# Allegro board pc065a_toplevel_06.brd
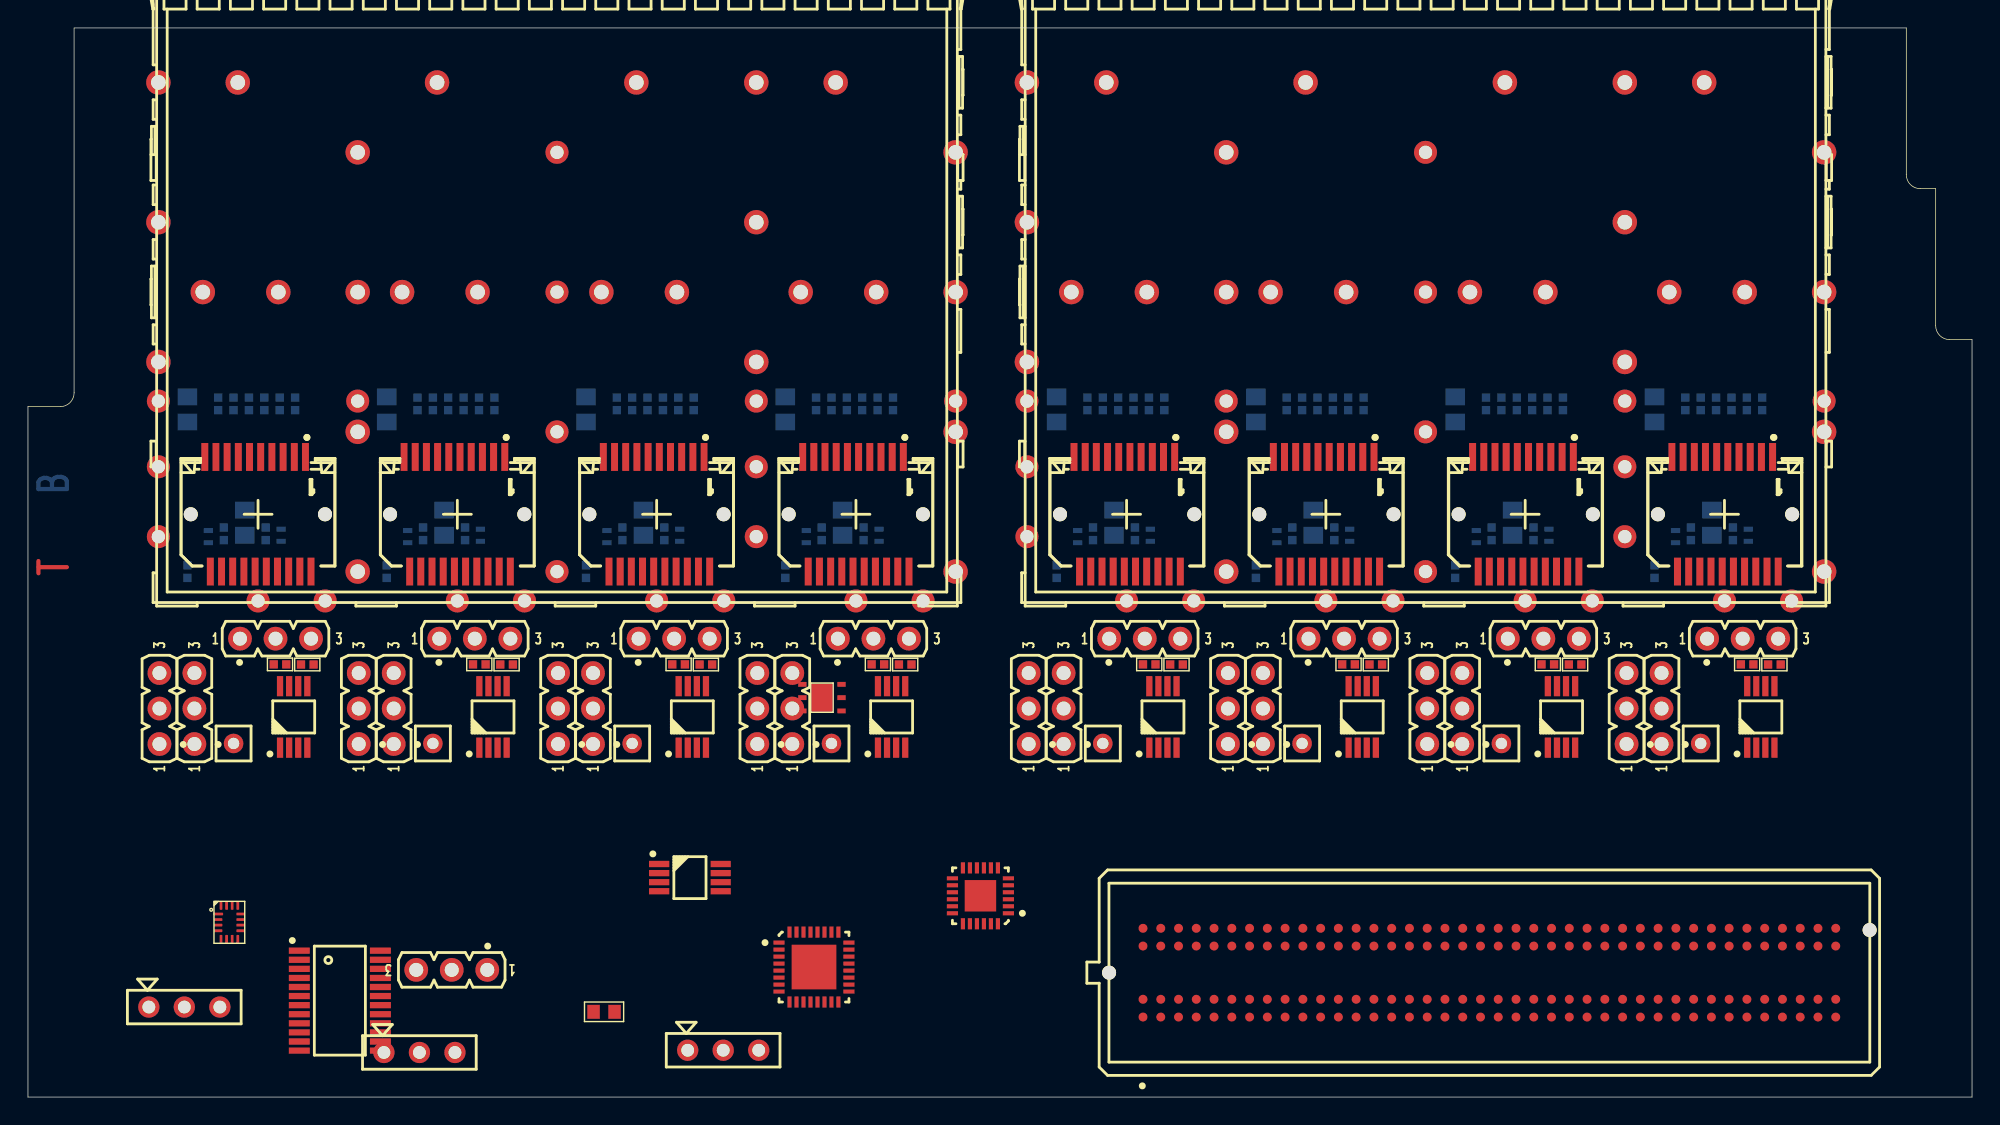
[diagram p0: board, top side]
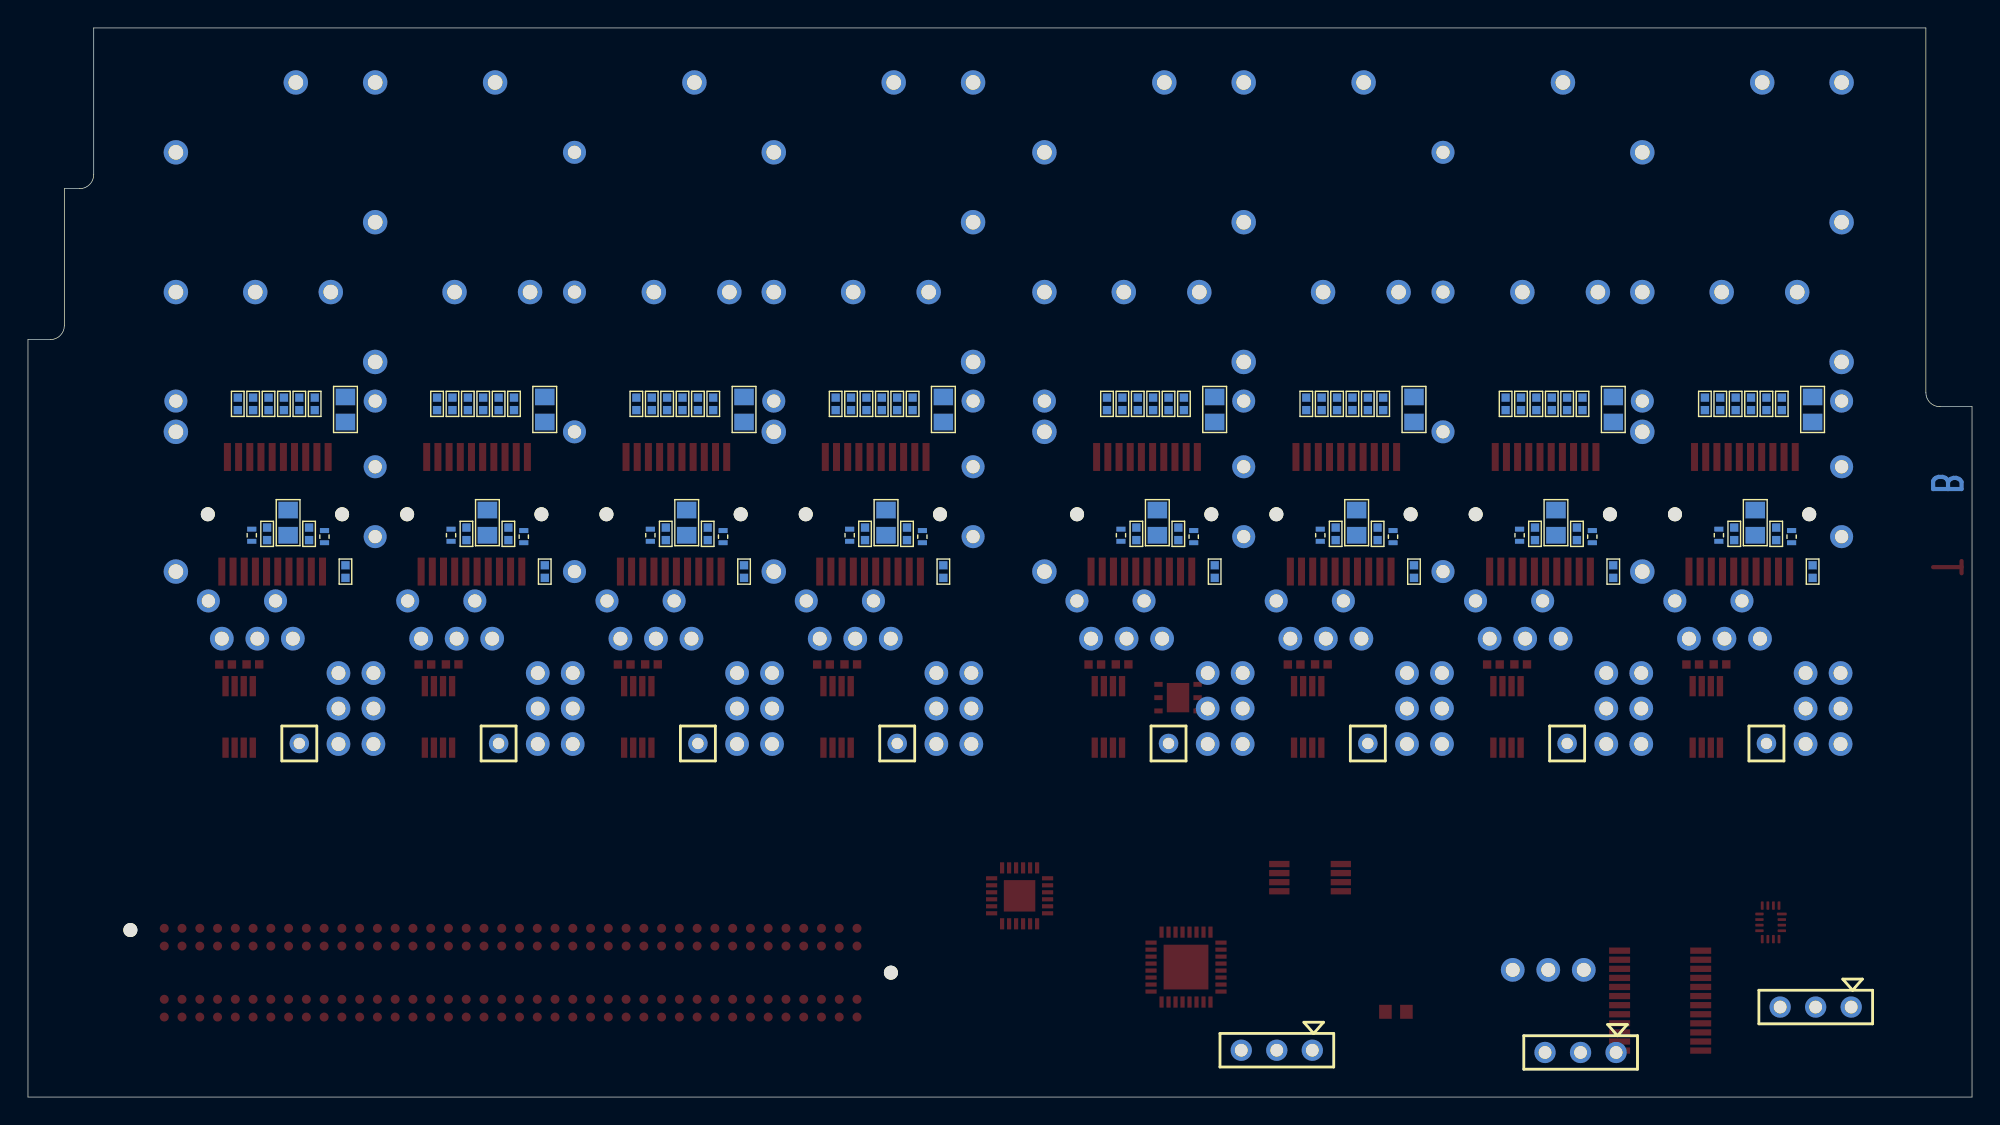
[diagram p1: board, bottom side, seen from below]

Outline 139 x 76.5 mm; copper layers: TOP, L2, L3, L4, L5, BOTTOM. Coordinates in mm from the lower left corner of the outline.
Outline path: 0,49.4 0,0 139,0 139,54.2 137.4,54.2 arc(136.69,54.49) 136.4,55.2 136.4,65 135.3,65 arc(134.59,65.29) 134.3,66 134.3,76.5 3.3,76.5 3.3,50.4 arc(3.01,49.69) 2.3,49.4 0,49.4

## Design rules (mm)
constraint set DEFAULT: min track width 0.17, pair gap 0.3
net group CLK_IN_N: nets CLK_IN_N<0> CLK_IN_N<1> CLK_IN_N<2> CLK_IN_N<3>
net group CLK_IN_P: nets CLK_IN_P<0> CLK_IN_P<1> CLK_IN_P<2> CLK_IN_P<3>
net group CLK_MAIN_N: nets CLK_MAIN_N<0> CLK_MAIN_N<1> CLK_MAIN_N<2> CLK_MAIN_N<3> CLK_MAIN_N<4> CLK_MAIN_N<5> CLK_MAIN_N<6> CLK_MAIN_N<7> CLK_MAIN_N<8>
net group CLK_MAIN_P: nets CLK_MAIN_P<0> CLK_MAIN_P<1> CLK_MAIN_P<2> CLK_MAIN_P<3> CLK_MAIN_P<4> CLK_MAIN_P<5> CLK_MAIN_P<6> CLK_MAIN_P<7> CLK_MAIN_P<8>
net group CLK_SI_N: nets CLK_SI_N<0> CLK_SI_N<1> CLK_SI_N<2> CLK_SI_N<3>
net group CLK_SI_P: nets CLK_SI_P<0> CLK_SI_P<1> CLK_SI_P<2> CLK_SI_P<3>
net group FMC_LA_N: nets FMC_LA_N<3> FMC_LA_N<8> FMC_LA_N<12> FMC_LA_N<16> FMC_LA_N<17> FMC_LA_N<20> FMC_LA_N<22> FMC_LA_N<23> FMC_LA_N<25> FMC_LA_N<27> FMC_LA_N<28> FMC_LA_N<29> FMC_LA_N<30> FMC_LA_N<31> FMC_LA_N<32> FMC_LA_N<33> RST_I2C_B_CVCC
net group FMC_LA_P: nets FMC_LA_P<3> FMC_LA_P<8> FMC_LA_P<12> FMC_LA_P<16> FMC_LA_P<17> FMC_LA_P<20> FMC_LA_P<22> FMC_LA_P<23> FMC_LA_P<25> FMC_LA_P<26> FMC_LA_P<27> FMC_LA_P<28> FMC_LA_P<29> FMC_LA_P<30> FMC_LA_P<31> FMC_LA_P<32> FMC_LA_P<33>
net group MUX_SEL: nets MUX_SEL<0> MUX_SEL<1> MUX_SEL<2>
net group RD_BUF_N: nets RD_BUF_N<0> RD_BUF_N<1> RD_BUF_N<2> RD_BUF_N<3>
net group RD_BUF_P: nets RD_BUF_P<0> RD_BUF_P<1> RD_BUF_P<2> RD_BUF_P<3>
net group RD_MUX_N: nets RD_MUX_N<0> RD_MUX_N<1> RD_MUX_N<2> RD_MUX_N<3> RD_MUX_N<4> RD_MUX_N<5> RD_MUX_N<6> RD_MUX_N<7>
net group RD_MUX_P: nets RD_MUX_P<0> RD_MUX_P<1> RD_MUX_P<2> RD_MUX_P<3> RD_MUX_P<4> RD_MUX_P<5> RD_MUX_P<6> RD_MUX_P<7>
net group SFP_FAULT: nets SFP_FAULT<0> SFP_FAULT<1> SFP_FAULT<2> SFP_FAULT<3>
net group SFP_I2C_SCL: nets SFP_I2C_SCL<0> SFP_I2C_SCL<1> SFP_I2C_SCL<2> SFP_I2C_SCL<3> SFP_I2C_SCL<4> SFP_I2C_SCL<5> SFP_I2C_SCL<6> SFP_I2C_SCL<7>
net group SFP_I2C_SCL_CVCC: nets FMC_LA_N<1> FMC_LA_N<5> FMC_LA_N<6> FMC_LA_N<9> FMC_LA_N<10> FMC_LA_N<13> FMC_LA_N<14> FMC_LA_N<18>
net group SFP_I2C_SDA: nets SFP_I2C_SDA<0> SFP_I2C_SDA<1> SFP_I2C_SDA<2> SFP_I2C_SDA<3> SFP_I2C_SDA<4> SFP_I2C_SDA<5> SFP_I2C_SDA<6> SFP_I2C_SDA<7>
net group SFP_I2C_SDA_CVCC: nets FMC_LA_P<1> FMC_LA_P<5> FMC_LA_P<6> FMC_LA_P<9> FMC_LA_P<10> FMC_LA_P<13> FMC_LA_P<14> FMC_LA_P<18>
net group SFP_LOS: nets SFP_LOS<0> SFP_LOS<1> SFP_LOS<2> SFP_LOS<3> SFP_LOS<4> SFP_LOS<5> SFP_LOS<6> SFP_LOS<7>
net group SFP_TX_DISABLE: nets SFP_TX_DISABLE<0> SFP_TX_DISABLE<1> SFP_TX_DISABLE<2> SFP_TX_DISABLE<3> SFP_TX_DISABLE<4> SFP_TX_DISABLE<5> SFP_TX_DISABLE<6> SFP_TX_DISABLE<7>
net group SFP_TX_FAULT: nets SFP_TX_FAULT<4> SFP_TX_FAULT<5> SFP_TX_FAULT<6> SFP_TX_FAULT<7>
net group TD_FFD_N: nets FMC_LA_N<2> FMC_LA_N<4> FMC_LA_N<7> FMC_LA_N<11> FMC_LA_N<15> FMC_LA_N<19> FMC_LA_N<21> FMC_LA_N<24>
net group TD_FFD_P: nets FMC_LA_P<2> FMC_LA_P<4> FMC_LA_P<7> FMC_LA_P<11> FMC_LA_P<15> FMC_LA_P<19> FMC_LA_P<21> FMC_LA_P<24>

## Placement (name value [footprint] x y rotation side)
C31  100nF  [C0402]  11.4 37.6 270 bottom
C32  10uF  [C0805]  11.4 49.2 90 bottom
C33  100nF  [C0402]  17 40.3 270 bottom
C34  10uF  [C0805]  15.5 41.1 270 bottom
C35  100nF  [C0402]  14 40.3 270 bottom
C40  100nF  [C0402]  25.65 37.6 270 bottom
C41  10uF  [C0805]  25.65 49.2 90 bottom
C42  100nF  [C0402]  31.25 40.3 270 bottom
C43  10uF  [C0805]  29.75 41.1 270 bottom
C44  100nF  [C0402]  28.25 40.3 270 bottom
C45  100nF  [C0402]  39.9 37.6 270 bottom
C46  10uF  [C0805]  39.9 49.2 90 bottom
C47  100nF  [C0402]  45.5 40.3 270 bottom
C48  10uF  [C0805]  44 41.1 270 bottom
C49  100nF  [C0402]  42.5 40.3 270 bottom
C50  100nF  [C0402]  54.15 37.6 270 bottom
C51  10uF  [C0805]  54.15 49.2 90 bottom
C52  100nF  [C0402]  59.75 40.3 270 bottom
C53  10uF  [C0805]  58.25 41.1 270 bottom
C54  100nF  [C0402]  56.75 40.3 270 bottom
C59  100nF  [C0402]  116.3 37.6 270 bottom
C60  10uF  [C0805]  116.3 49.2 90 bottom
C61  100nF  [C0402]  121.9 40.3 270 bottom
C62  10uF  [C0805]  120.4 41.1 270 bottom
C63  100nF  [C0402]  118.9 40.3 270 bottom
C64  100nF  [C0402]  102.05 37.6 270 bottom
C65  10uF  [C0805]  102.05 49.2 90 bottom
C66  100nF  [C0402]  107.65 40.3 270 bottom
C67  10uF  [C0805]  106.15 41.1 270 bottom
C68  100nF  [C0402]  104.65 40.3 270 bottom
C69  100nF  [C0402]  87.8 37.6 270 bottom
C70  10uF  [C0805]  87.8 49.2 90 bottom
C71  100nF  [C0402]  93.4 40.3 270 bottom
C72  10uF  [C0805]  91.9 41.1 270 bottom
C73  100nF  [C0402]  90.4 40.3 270 bottom
C74  100nF  [C0402]  73.55 37.6 270 bottom
C75  10uF  [C0805]  73.55 49.2 90 bottom
C76  100nF  [C0402]  79.15 40.3 270 bottom
C77  10uF  [C0805]  77.65 41.1 270 bottom
C78  100nF  [C0402]  76.15 40.3 270 bottom
IC1  -  [SOP65P640X120-24N]  22.3 6.9 0 top
IC2  -  [QFN50P500X500X90-33N-S320]  56.2 9.3 0 top
IC10  -  [QFN50P400X400X80-25N-S225]  68.1 14.4 180 top
IC21  -  [UQFN_16PIN]  14.4 12.5 0 top
J1  -  [SAMTEC_MTLW-103-07-L-S-250]  30.3 9.1 180 top
J2  -  [CONHE13D3X1M]  8.64 6.44 0 top
J3  -  [CONHE13D3X1M]  25.45 3.19 0 top
J4  -  [CONHE13D3X1M]  47.17 3.35 0 top
J6  -  [SAMTEC_MTLW-103-07-L-S-250]  17.7 32.8 0 top
J7  -  [TYCO_1888247-1]  16.44 41.7 270 top
J8  -  [SAMTEC_MTLW-103-07-L-S-250]  9.4 27.8 90 top
J9  -  [SAMTEC_MTLW-103-07-L-S-250]  11.9 27.8 90 top
J10  -  [SAMTEC_ASP-134606-01]  104.49 8.9 180 top
J11  -  [SAMTEC_MTLW-103-07-L-S-250]  31.95 32.8 0 top
J12  -  [TYCO_1888247-1]  30.69 41.7 270 top
J13  -  [SAMTEC_MTLW-103-07-L-S-250]  23.65 27.8 90 top
J14  -  [SAMTEC_MTLW-103-07-L-S-250]  26.15 27.8 90 top
J15  -  [SAMTEC_MTLW-103-07-L-S-250]  46.2 32.8 0 top
J16  -  [TYCO_1888247-1]  44.94 41.7 270 top
J17  -  [SAMTEC_MTLW-103-07-L-S-250]  37.9 27.8 90 top
J18  -  [SAMTEC_MTLW-103-07-L-S-250]  40.4 27.8 90 top
J19  -  [SAMTEC_MTLW-103-07-L-S-250]  60.45 32.8 0 top
J20  -  [TYCO_1888247-1]  59.19 41.7 270 top
J21  -  [SAMTEC_MTLW-103-07-L-S-250]  52.15 27.8 90 top
J22  -  [SAMTEC_MTLW-103-07-L-S-250]  54.65 27.8 90 top
J23  -  [SAMTEC_MTLW-103-07-L-S-250]  122.6 32.8 0 top
J24  -  [TYCO_1888247-1]  121.34 41.7 270 top
J25  -  [SAMTEC_MTLW-103-07-L-S-250]  114.3 27.8 90 top
J26  -  [SAMTEC_MTLW-103-07-L-S-250]  116.8 27.8 90 top
J27  -  [SAMTEC_MTLW-103-07-L-S-250]  108.35 32.8 0 top
J28  -  [TYCO_1888247-1]  107.09 41.7 270 top
J29  -  [SAMTEC_MTLW-103-07-L-S-250]  100.05 27.8 90 top
J30  -  [SAMTEC_MTLW-103-07-L-S-250]  102.55 27.8 90 top
J31  -  [SAMTEC_MTLW-103-07-L-S-250]  94.1 32.8 0 top
J32  -  [TYCO_1888247-1]  92.84 41.7 270 top
J33  -  [SAMTEC_MTLW-103-07-L-S-250]  85.8 27.8 90 top
J34  -  [SAMTEC_MTLW-103-07-L-S-250]  88.3 27.8 90 top
J35  -  [SAMTEC_MTLW-103-07-L-S-250]  79.85 32.8 0 top
J36  -  [TYCO_1888247-1]  78.59 41.7 270 top
J37  -  [SAMTEC_MTLW-103-07-L-S-250]  71.55 27.8 90 top
J38  -  [SAMTEC_MTLW-103-07-L-S-250]  74.05 27.8 90 top
L4  4.7nH  [INDC_0402HP]  18.1 40.2 270 bottom
L5  4.7nH  [INDC_0402HP]  12.9 40.1 90 bottom
L6  4.7nH  [INDC_0402HP]  32.35 40.2 270 bottom
L7  4.7nH  [INDC_0402HP]  27.15 40.1 90 bottom
L8  4.7nH  [INDC_0402HP]  46.6 40.2 270 bottom
L9  4.7nH  [INDC_0402HP]  41.4 40.1 90 bottom
L10  4.7nH  [INDC_0402HP]  60.85 40.2 270 bottom
L11  4.7nH  [INDC_0402HP]  55.65 40.1 90 bottom
L12  4.7nH  [INDC_0402HP]  123 40.2 270 bottom
L13  4.7nH  [INDC_0402HP]  117.8 40.1 90 bottom
L14  4.7nH  [INDC_0402HP]  108.75 40.2 270 bottom
L15  4.7nH  [INDC_0402HP]  103.55 40.1 90 bottom
L16  4.7nH  [INDC_0402HP]  94.5 40.2 270 bottom
L17  4.7nH  [INDC_0402HP]  89.3 40.1 90 bottom
L18  4.7nH  [INDC_0402HP]  80.25 40.2 270 bottom
L19  4.7nH  [INDC_0402HP]  75.05 40.1 90 bottom
R1  00  [C0603]  41.19 6.1 0 top
R22  51  [C0402]  18.02 30.96 180 top
R23  51  [C0402]  19.97 30.95 0 top
R24  4.7k  [C0402]  19.1 49.6 270 bottom
R25  4.7k  [C0402]  13.6 49.6 270 bottom
R26  4.7k  [C0402]  15.8 49.6 90 bottom
R27  4.7k  [C0402]  16.9 49.6 90 bottom
R28  4.7k  [C0402]  18 49.6 90 bottom
R29  4.7k  [C0402]  14.7 49.6 90 bottom
R34  51  [C0402]  32.27 30.96 180 top
R35  51  [C0402]  34.22 30.95 0 top
R36  4.7k  [C0402]  33.35 49.6 270 bottom
R37  4.7k  [C0402]  27.85 49.6 270 bottom
R38  4.7k  [C0402]  30.05 49.6 90 bottom
R39  4.7k  [C0402]  31.15 49.6 90 bottom
R40  4.7k  [C0402]  32.25 49.6 90 bottom
R41  4.7k  [C0402]  28.95 49.6 90 bottom
R42  51  [C0402]  46.52 30.96 180 top
R43  51  [C0402]  48.47 30.95 0 top
R44  4.7k  [C0402]  47.6 49.6 270 bottom
R45  4.7k  [C0402]  42.1 49.6 270 bottom
R46  4.7k  [C0402]  44.3 49.6 90 bottom
R47  4.7k  [C0402]  45.4 49.6 90 bottom
R48  4.7k  [C0402]  46.5 49.6 90 bottom
R49  4.7k  [C0402]  43.2 49.6 90 bottom
R50  51  [C0402]  60.77 30.96 180 top
R51  51  [C0402]  62.72 30.95 0 top
R52  4.7k  [C0402]  61.85 49.6 270 bottom
R53  4.7k  [C0402]  56.35 49.6 270 bottom
R54  4.7k  [C0402]  58.55 49.6 90 bottom
R55  4.7k  [C0402]  59.65 49.6 90 bottom
R56  4.7k  [C0402]  60.75 49.6 90 bottom
R57  4.7k  [C0402]  57.45 49.6 90 bottom
R99  51  [C0402]  122.92 30.96 180 top
R100  51  [C0402]  124.87 30.95 0 top
R101  4.7k  [C0402]  124 49.6 270 bottom
R102  4.7k  [C0402]  118.5 49.6 270 bottom
R103  4.7k  [C0402]  120.7 49.6 90 bottom
R104  4.7k  [C0402]  121.8 49.6 90 bottom
R105  4.7k  [C0402]  122.9 49.6 90 bottom
R106  4.7k  [C0402]  119.6 49.6 90 bottom
R107  51  [C0402]  108.67 30.96 180 top
R108  51  [C0402]  110.62 30.95 0 top
R109  4.7k  [C0402]  109.75 49.6 270 bottom
R110  4.7k  [C0402]  104.25 49.6 270 bottom
R111  4.7k  [C0402]  106.45 49.6 90 bottom
R112  4.7k  [C0402]  107.55 49.6 90 bottom
R113  4.7k  [C0402]  108.65 49.6 90 bottom
R114  4.7k  [C0402]  105.35 49.6 90 bottom
R115  51  [C0402]  94.42 30.96 180 top
R116  51  [C0402]  96.37 30.95 0 top
R117  4.7k  [C0402]  95.5 49.6 270 bottom
R118  4.7k  [C0402]  90 49.6 270 bottom
R119  4.7k  [C0402]  92.2 49.6 90 bottom
R120  4.7k  [C0402]  93.3 49.6 90 bottom
R121  4.7k  [C0402]  94.4 49.6 90 bottom
R122  4.7k  [C0402]  91.1 49.6 90 bottom
R123  51  [C0402]  80.17 30.96 180 top
R124  51  [C0402]  82.12 30.95 0 top
R125  4.7k  [C0402]  81.25 49.6 270 bottom
R126  4.7k  [C0402]  75.75 49.6 270 bottom
R127  4.7k  [C0402]  77.95 49.6 90 bottom
R128  4.7k  [C0402]  79.05 49.6 90 bottom
R129  4.7k  [C0402]  80.15 49.6 90 bottom
R130  4.7k  [C0402]  76.85 49.6 90 bottom
SFP1  -  [TYCO_2007132]  59.2 41.7 270 top
SFP2  -  [TYCO_2007132]  121.3 41.7 270 top
TP2  -  [TP_HOLE_08]  14.7 25.3 0 top
TP3  -  [TP_HOLE_08]  28.95 25.3 0 top
TP4  -  [TP_HOLE_08]  43.2 25.3 0 top
TP5  -  [TP_HOLE_08]  57.45 25.3 0 top
TP6  -  [TP_HOLE_08]  119.6 25.3 0 top
TP7  -  [TP_HOLE_08]  105.35 25.3 0 top
TP8  -  [TP_HOLE_08]  91.1 25.3 0 top
TP9  -  [TP_HOLE_08]  76.85 25.3 0 top
U1  -  [SOP65P490X110-8N]  47.33 15.7 0 top
U2  -  [WSON6]  56.77 28.58 0 top
U3  -  [SOP65P490X110-8N]  19 27.2 90 top
U4  -  [SOP65P490X110-8N]  33.25 27.2 90 top
U5  -  [SOP65P490X110-8N]  47.5 27.2 90 top
U6  -  [SOP65P490X110-8N]  61.75 27.2 90 top
U7  -  [SOP65P490X110-8N]  123.9 27.2 90 top
U8  -  [SOP65P490X110-8N]  109.65 27.2 90 top
U9  -  [SOP65P490X110-8N]  95.4 27.2 90 top
U10  -  [SOP65P490X110-8N]  81.15 27.2 90 top

## Library data of the parts
C31 C33 C35 = CAPCERSMDCL2: part number: CAPCERSMDCL2_0402-100NF_X7R,16V; tolerance: 10%; room: SFP_0
C32 C34 = CAPCERSMDCL2: part number: CAPCERSMDCL2_0805-10UF,10V_GEN; tolerance: 10%; room: SFP_0
C40 C42 C44 = CAPCERSMDCL2: part number: CAPCERSMDCL2_0402-100NF_X7R,16V; tolerance: 10%; room: SFP_1
C41 C43 = CAPCERSMDCL2: part number: CAPCERSMDCL2_0805-10UF,10V_GEN; tolerance: 10%; room: SFP_1
C45 C47 C49 = CAPCERSMDCL2: part number: CAPCERSMDCL2_0402-100NF_X7R,16V; tolerance: 10%; room: SFP_2
C46 C48 = CAPCERSMDCL2: part number: CAPCERSMDCL2_0805-10UF,10V_GEN; tolerance: 10%; room: SFP_2
C50 C52 C54 = CAPCERSMDCL2: part number: CAPCERSMDCL2_0402-100NF_X7R,16V; tolerance: 10%; room: SFP_3
C51 C53 = CAPCERSMDCL2: part number: CAPCERSMDCL2_0805-10UF,10V_GEN; tolerance: 10%; room: SFP_3
C59 C61 C63 = CAPCERSMDCL2: part number: CAPCERSMDCL2_0402-100NF_X7R,16V; tolerance: 10%; room: SFP_7
C60 C62 = CAPCERSMDCL2: part number: CAPCERSMDCL2_0805-10UF,10V_GEN; tolerance: 10%; room: SFP_7
C64 C66 C68 = CAPCERSMDCL2: part number: CAPCERSMDCL2_0402-100NF_X7R,16V; tolerance: 10%; room: SFP_6
C65 C67 = CAPCERSMDCL2: part number: CAPCERSMDCL2_0805-10UF,10V_GEN; tolerance: 10%; room: SFP_6
C69 C71 C73 = CAPCERSMDCL2: part number: CAPCERSMDCL2_0402-100NF_X7R,16V; tolerance: 10%; room: SFP_5
C70 C72 = CAPCERSMDCL2: part number: CAPCERSMDCL2_0805-10UF,10V_GEN; tolerance: 10%; room: SFP_5
C74 C76 C78 = CAPCERSMDCL2: part number: CAPCERSMDCL2_0402-100NF_X7R,16V; tolerance: 10%; room: SFP_4
C75 C77 = CAPCERSMDCL2: part number: CAPCERSMDCL2_0805-10UF,10V_GEN; tolerance: 10%; room: SFP_4
IC1 = 854S058I: part number: 854S058AGILF
IC2 = SY89838U: part number: SY89838UMG
IC10 = TCA9539: part number: TCA9539AHF
IC21 = 74AVC4T245_BRIS: part number: SN74AVC4T245RSVR_BRIS
J1 = CON3P: part number: CON3P-MTLW-103-07-L-S-250
J2-J4 = CON3P: part number: CON3P-SIL254D
J6 J8 J9 = CON3P: part number: CON3P-MTLW-103-07-L-S-250; room: SFP_0
J7 = CON20P_SFP: part number: CON20P_SFP-1888247-1; room: SFP_0
J10 = CON160P_40CDGH: part number: ASP-134606-01
J11 J13 J14 = CON3P: part number: CON3P-MTLW-103-07-L-S-250; room: SFP_1
J12 = CON20P_SFP: part number: CON20P_SFP-1888247-1; room: SFP_1
J15 J17 J18 = CON3P: part number: CON3P-MTLW-103-07-L-S-250; room: SFP_2
J16 = CON20P_SFP: part number: CON20P_SFP-1888247-1; room: SFP_2
J19 J21 J22 = CON3P: part number: CON3P-MTLW-103-07-L-S-250; room: SFP_3
J20 = CON20P_SFP: part number: CON20P_SFP-1888247-1; room: SFP_3
J23 J25 J26 = CON3P: part number: CON3P-MTLW-103-07-L-S-250; room: SFP_7
J24 = CON20P_SFP: part number: CON20P_SFP-1888247-1; room: SFP_7
J27 J29 J30 = CON3P: part number: CON3P-MTLW-103-07-L-S-250; room: SFP_6
J28 = CON20P_SFP: part number: CON20P_SFP-1888247-1; room: SFP_6
J31 J33 J34 = CON3P: part number: CON3P-MTLW-103-07-L-S-250; room: SFP_5
J32 = CON20P_SFP: part number: CON20P_SFP-1888247-1; room: SFP_5
J35 J37 J38 = CON3P: part number: CON3P-MTLW-103-07-L-S-250; room: SFP_4
J36 = CON20P_SFP: part number: CON20P_SFP-1888247-1; room: SFP_4
L4 L5 = INDUCTANCE: part number: INDUCTANCE_0402HP-4.7NH_2%; tolerance: 2%; room: SFP_0
L6 L7 = INDUCTANCE: part number: INDUCTANCE_0402HP-4.7NH_2%; tolerance: 2%; room: SFP_1
L8 L9 = INDUCTANCE: part number: INDUCTANCE_0402HP-4.7NH_2%; tolerance: 2%; room: SFP_2
L10 L11 = INDUCTANCE: part number: INDUCTANCE_0402HP-4.7NH_2%; tolerance: 2%; room: SFP_3
L12 L13 = INDUCTANCE: part number: INDUCTANCE_0402HP-4.7NH_2%; tolerance: 2%; room: SFP_7
L14 L15 = INDUCTANCE: part number: INDUCTANCE_0402HP-4.7NH_2%; tolerance: 2%; room: SFP_6
L16 L17 = INDUCTANCE: part number: INDUCTANCE_0402HP-4.7NH_2%; tolerance: 2%; room: SFP_5
L18 L19 = INDUCTANCE: part number: INDUCTANCE_0402HP-4.7NH_2%; tolerance: 2%; room: SFP_4
R1 = RSMD0603: part number: RSMD0603_-00,
R22 R23 = RSMD0402: part number: RSMD0402_1/16W-51,1%; tolerance: 1%; room: SFP_0
R24-R29 = RSMD0402: part number: RSMD0402_1/16W-4.7K,1%; tolerance: 1%; room: SFP_0
R34 R35 = RSMD0402: part number: RSMD0402_1/16W-51,1%; tolerance: 1%; room: SFP_1
R36-R41 = RSMD0402: part number: RSMD0402_1/16W-4.7K,1%; tolerance: 1%; room: SFP_1
R42 R43 = RSMD0402: part number: RSMD0402_1/16W-51,1%; tolerance: 1%; room: SFP_2
R44-R49 = RSMD0402: part number: RSMD0402_1/16W-4.7K,1%; tolerance: 1%; room: SFP_2
R50 R51 = RSMD0402: part number: RSMD0402_1/16W-51,1%; tolerance: 1%; room: SFP_3
R52-R57 = RSMD0402: part number: RSMD0402_1/16W-4.7K,1%; tolerance: 1%; room: SFP_3
R99 R100 = RSMD0402: part number: RSMD0402_1/16W-51,1%; tolerance: 1%; room: SFP_7
R101-R106 = RSMD0402: part number: RSMD0402_1/16W-4.7K,1%; tolerance: 1%; room: SFP_7
R107 R108 = RSMD0402: part number: RSMD0402_1/16W-51,1%; tolerance: 1%; room: SFP_6
R109-R114 = RSMD0402: part number: RSMD0402_1/16W-4.7K,1%; tolerance: 1%; room: SFP_6
R115 R116 = RSMD0402: part number: RSMD0402_1/16W-51,1%; tolerance: 1%; room: SFP_5
R117-R122 = RSMD0402: part number: RSMD0402_1/16W-4.7K,1%; tolerance: 1%; room: SFP_5
R123 R124 = RSMD0402: part number: RSMD0402_1/16W-51,1%; tolerance: 1%; room: SFP_4
R125-R130 = RSMD0402: part number: RSMD0402_1/16W-4.7K,1%; tolerance: 1%; room: SFP_4
SFP1 SFP2 = SFP_CAGE_X4: part number: TYCO_2007132
TP2 = TP: part number: TP_HOLE-0.8MM; room: SFP_0
TP3 = TP: part number: TP_HOLE-0.8MM; room: SFP_1
TP4 = TP: part number: TP_HOLE-0.8MM; room: SFP_2
TP5 = TP: part number: TP_HOLE-0.8MM; room: SFP_3
TP6 = TP: part number: TP_HOLE-0.8MM; room: SFP_7
TP7 = TP: part number: TP_HOLE-0.8MM; room: SFP_6
TP8 = TP: part number: TP_HOLE-0.8MM; room: SFP_5
TP9 = TP: part number: TP_HOLE-0.8MM; room: SFP_4
U1 = MAX9381_UMAX
U2 = LP38692SD: part number: LP38692SD_WSON-1.8V,TEXAS INSTRUMENTS; room: CLOCK_MODULE
U3 = MAX9381_UMAX: room: SFP_0
U4 = MAX9381_UMAX: room: SFP_1
U5 = MAX9381_UMAX: room: SFP_2
U6 = MAX9381_UMAX: room: SFP_3
U7 = MAX9381_UMAX: room: SFP_7
U8 = MAX9381_UMAX: room: SFP_6
U9 = MAX9381_UMAX: room: SFP_5
U10 = MAX9381_UMAX: room: SFP_4

## Footprints (pads in the part's own frame, mm; a bottom-side part is the same pattern mirrored in y, then rotated)
C0402
  rect 0.6x0.6 smd: 1(-0.45,0) 2(0.45,0)
C0603
  rect 0.9x1 smd: 1(-0.75,0) 2(0.75,0)
C0805
  rect 1.2x1.4 smd: 1(-0.9,0) 2(0.9,0)
CONHE13D3X1M
  round 1.524 hole 0.914: 1(0,0) 2(2.54,0) 3(5.08,0)
INDC_0402HP
  rect 0.356x0.66 smd: 1(-0.435,0) 2(0.435,0)
QFN50P400X400X80-25N-S225
  rect 0.8x0.3 smd: 1(-2,1.25) 2(-2,0.75) 3(-2,0.25) 4(-2,-0.25) 5(-2,-0.75) 6(-2,-1.25) 13(2,-1.25) 14(2,-0.75) 15(2,-0.25) 16(2,0.25) 17(2,0.75) 18(2,1.25)
  rect 0.3x0.8 smd: 7(-1.25,-2) 8(-0.75,-2) 9(-0.25,-2) 10(0.25,-2) 11(0.75,-2) 12(1.25,-2) 19(1.25,2) 20(0.75,2) 21(0.25,2) 22(-0.25,2) 23(-0.75,2) 24(-1.25,2)
  rect 2.25x2.25 smd: 25(0,0)
QFN50P500X500X90-33N-S320
  rect 0.8x0.3 smd: 1(-2.5,1.75) 2(-2.5,1.25) 3(-2.5,0.75) 4(-2.5,0.25) 5(-2.5,-0.25) 6(-2.5,-0.75) 7(-2.5,-1.25) 8(-2.5,-1.75) 17(2.5,-1.75) 18(2.5,-1.25) 19(2.5,-0.75) 20(2.5,-0.25) 21(2.5,0.25) 22(2.5,0.75) 23(2.5,1.25) 24(2.5,1.75)
  rect 0.3x0.8 smd: 9(-1.75,-2.5) 10(-1.25,-2.5) 11(-0.75,-2.5) 12(-0.25,-2.5) 13(0.25,-2.5) 14(0.75,-2.5) 15(1.25,-2.5) 16(1.75,-2.5) 25(1.75,2.5) 26(1.25,2.5) 27(0.75,2.5) 28(0.25,2.5) 29(-0.25,2.5) 30(-0.75,2.5) 31(-1.25,2.5) 32(-1.75,2.5)
  rect 3.2x3.2 smd: 33(0,0)
SAMTEC_ASP-134606-01
  round 1.001 hole 1.3 unplated: (-27.19,-3.05) (27.19,0)
  round 0.64 smd: C1(24.765,3.175) C2(23.495,3.175) C3(22.225,3.175) C4(20.955,3.175) C5(19.685,3.175) C6(18.415,3.175) C7(17.145,3.175) C8(15.875,3.175) C9(14.605,3.175) C10(13.335,3.175) C11(12.065,3.175) C12(10.795,3.175) C13(9.525,3.175) C14(8.255,3.175) C15(6.985,3.175) C16(5.715,3.175) C17(4.445,3.175) C18(3.175,3.175) C19(1.905,3.175) C20(0.635,3.175) C21(-0.635,3.175) C22(-1.905,3.175) C23(-3.175,3.175) C24(-4.445,3.175) C25(-5.715,3.175) C26(-6.985,3.175) C27(-8.255,3.175) C28(-9.525,3.175) C29(-10.795,3.175) C30(-12.065,3.175) C31(-13.335,3.175) C32(-14.605,3.175) C33(-15.875,3.175) C34(-17.145,3.175) C35(-18.415,3.175) C36(-19.685,3.175) C37(-20.955,3.175) C38(-22.225,3.175) C39(-23.495,3.175) C40(-24.765,3.175) D1(24.765,1.905) D2(23.495,1.905) D3(22.225,1.905) D4(20.955,1.905) D5(19.685,1.905) D6(18.415,1.905) D7(17.145,1.905) D8(15.875,1.905) D9(14.605,1.905) D10(13.335,1.905) D11(12.065,1.905) D12(10.795,1.905) D13(9.525,1.905) D14(8.255,1.905) D15(6.985,1.905) D16(5.715,1.905) D17(4.445,1.905) D18(3.175,1.905) D19(1.905,1.905) D20(0.635,1.905) D21(-0.635,1.905) D22(-1.905,1.905) D23(-3.175,1.905) D24(-4.445,1.905) D25(-5.715,1.905) D26(-6.985,1.905) D27(-8.255,1.905) D28(-9.525,1.905) D29(-10.795,1.905) D30(-12.065,1.905) D31(-13.335,1.905) D32(-14.605,1.905) D33(-15.875,1.905) D34(-17.145,1.905) D35(-18.415,1.905) D36(-19.685,1.905) D37(-20.955,1.905) D38(-22.225,1.905) D39(-23.495,1.905) D40(-24.765,1.905) G1(24.765,-1.905) G2(23.495,-1.905) G3(22.225,-1.905) G4(20.955,-1.905) G5(19.685,-1.905) G6(18.415,-1.905) G7(17.145,-1.905) G8(15.875,-1.905) G9(14.605,-1.905) G10(13.335,-1.905) G11(12.065,-1.905) G12(10.795,-1.905) G13(9.525,-1.905) G14(8.255,-1.905) G15(6.985,-1.905) G16(5.715,-1.905) G17(4.445,-1.905) G18(3.175,-1.905) G19(1.905,-1.905) G20(0.635,-1.905) G21(-0.635,-1.905) G22(-1.905,-1.905) G23(-3.175,-1.905) G24(-4.445,-1.905) G25(-5.715,-1.905) G26(-6.985,-1.905) G27(-8.255,-1.905) G28(-9.525,-1.905) G29(-10.795,-1.905) G30(-12.065,-1.905) G31(-13.335,-1.905) G32(-14.605,-1.905) G33(-15.875,-1.905) G34(-17.145,-1.905) G35(-18.415,-1.905) G36(-19.685,-1.905) G37(-20.955,-1.905) G38(-22.225,-1.905) G39(-23.495,-1.905) G40(-24.765,-1.905) H1(24.765,-3.175) H2(23.495,-3.175) H3(22.225,-3.175) H4(20.955,-3.175) H5(19.685,-3.175) H6(18.415,-3.175) H7(17.145,-3.175) H8(15.875,-3.175) H9(14.605,-3.175) H10(13.335,-3.175) H11(12.065,-3.175) H12(10.795,-3.175) H13(9.525,-3.175) H14(8.255,-3.175) H15(6.985,-3.175) H16(5.715,-3.175) H17(4.445,-3.175) H18(3.175,-3.175) H19(1.905,-3.175) H20(0.635,-3.175) H21(-0.635,-3.175) H22(-1.905,-3.175) H23(-3.175,-3.175) H24(-4.445,-3.175) H25(-5.715,-3.175) H26(-6.985,-3.175) H27(-8.255,-3.175) H28(-9.525,-3.175) H29(-10.795,-3.175) H30(-12.065,-3.175) H31(-13.335,-3.175) H32(-14.605,-3.175) H33(-15.875,-3.175) H34(-17.145,-3.175) H35(-18.415,-3.175) H36(-19.685,-3.175) H37(-20.955,-3.175) H38(-22.225,-3.175) H39(-23.495,-3.175) H40(-24.765,-3.175)
SAMTEC_MTLW-103-07-L-S-250
  round 1.7 hole 1: 1(-2.54,0) 2(0,0) 3(2.54,0)
SOP65P490X110-8N
  rect 1.45x0.45 smd: 1(-2.2,0.975) 2(-2.2,0.325) 3(-2.2,-0.325) 4(-2.2,-0.975) 5(2.2,-0.975) 6(2.2,-0.325) 7(2.2,0.325) 8(2.2,0.975)
SOP65P640X120-24N
  rect 1.5x0.45 smd: 1(-2.9,3.575) 2(-2.9,2.925) 3(-2.9,2.275) 4(-2.9,1.625) 5(-2.9,0.975) 6(-2.9,0.325) 7(-2.9,-0.325) 8(-2.9,-0.975) 9(-2.9,-1.625) 10(-2.9,-2.275) 11(-2.9,-2.925) 12(-2.9,-3.575) 13(2.9,-3.575) 14(2.9,-2.925) 15(2.9,-2.275) 16(2.9,-1.625) 17(2.9,-0.975) 18(2.9,-0.325) 19(2.9,0.325) 20(2.9,0.975) 21(2.9,1.625) 22(2.9,2.275) 23(2.9,2.925) 24(2.9,3.575)
TP_HOLE_08
  round 1.397 hole 0.813: 1(0,0)
TYCO_1888247-1
  round 1 hole 1.55 unplated: (0,4.8) (0,-4.8)
  rect 2x0.5 smd: 1(-4.1,3.4) 2(-4.1,2.6) 3(-4.1,1.8) 4(-4.1,1) 5(-4.1,0.2) 6(-4.1,-0.6) 7(-4.1,-1.4) 8(-4.1,-2.2) 9(-4.1,-3) 10(-4.1,-3.8) 11(4.1,-3.4) 12(4.1,-2.6) 13(4.1,-1.8) 14(4.1,-1) 15(4.1,-0.2) 16(4.1,0.6) 17(4.1,1.4) 18(4.1,2.2) 19(4.1,3) 20(4.1,3.8)
TYCO_2007132
  round 1.75 hole 1.05: 1(-30.9,-49.875) 2(-30.9,-44.2) 3(-30.9,-29.95) 4(-30.9,-15.7) 5(-30.9,-7.125) 6(-30.9,-1.45) 7(-25.9,-35.625) 9(-25.9,7.125) 10(-20.9,-49.875) 11(-20.9,-7.125) 12(-15.9,-46.7) 13(-15.9,-41.3) 14(-15.9,-35.625) 15(-15.9,-32.45) 16(-15.9,-27.05) 18(-15.9,-18.2) 19(-15.9,-12.8) 20(-15.9,-3.95) 21(-15.9,1.45) 22(-15.9,7.125) 24(-10.9,-49.875) 27(-10.9,-7.125) 30(-5.9,-35.625) 33(-5.9,7.125) 38(4.1,-35.625) 46(4.1,7.125)
  round 1.65 hole 0.95: 8(-25.9,-21.375) 17(-15.9,-21.375) 23(-8.1,-49.875) 25(-8.1,-35.625) 26(-8.1,-7.125) 28(-8.1,7.125) 29(-3.4,-49.875) 31(-5.9,-21.375) 32(-3.4,-7.125) 34(1.6,-49.875) 35(1.6,-7.125) 36(6.2,-42.75) 37(6.2,-37.95) 39(6.2,-28.5) 40(4.1,-21.375) 41(6.2,-23.7) 42(6.2,-14.25) 43(6.2,-9.45) 44(6.2,0) 45(6.2,4.8)
  round 0 smd: NC(-17.517,-21.25)
UQFN_16PIN
  rrect 0.7x0.2 smd: 1(-0.8,0.6)
  rrect 0.6x0.2 smd: 2(-0.8,0.2) 3(-0.8,-0.2) 4(-0.8,-0.6) 9(0.8,-0.6) 10(0.8,-0.2) 11(0.8,0.2) 12(0.8,0.6)
  rrect 0.2x0.6 smd: 5(-0.6,-1.2) 6(-0.2,-1.2) 7(0.2,-1.2) 8(0.6,-1.2) 13(0.6,1.2) 14(0.2,1.2) 15(-0.2,1.2) 16(-0.6,1.2)
WSON6
  rect 0.6x0.35 smd: 1(-1.4,0.95) 2(-1.4,0) 3(-1.4,-0.95) 4(1.4,-0.95) 5(1.4,0) 6(1.4,0.95)
  rect 1.6x2.1 smd: 7(0,0)

## Nets
GND: C31.1 C32.1 C33.1 C34.1 C35.1 C40.1 C41.1 C42.1 C43.1 C44.1 C45.1 C46.1 C47.1 C48.1 C49.1 C50.1 C51.1 C52.1 C53.1 C54.1 C59.1 C60.1 C61.1 C62.1 C63.1 C64.1 C65.1 C66.1 C67.1 C68.1 C69.1 C70.1 C71.1 C72.1 C73.1 C74.1 C75.1 C76.1 C77.1 C78.1 IC1.17 IC2.20 IC2.21 IC2.33 IC10.9 IC10.25 IC21.10 IC21.11 J1.1 J6.1 J7.1 J7.9 J7.10 J7.11 J7.14 J7.17 J7.20(VEET3) J8.1 J9.1 J10.C1 J10.C4 J10.C5 J10.C8 J10.C9 J10.C12 J10.C13 J10.C16 J10.C17 J10.C20 J10.C21 J10.C24 J10.C25 J10.C28 J10.C29 J10.C32 J10.C33 J10.C36 J10.C38 J10.C40 J10.D2 J10.D3 J10.D6 J10.D7 J10.D10 J10.D13 J10.D16 J10.D19 J10.D22 J10.D25 J10.D28 J10.D37 J10.D39 J10.G1 J10.G4 J10.G5 J10.G8 J10.G11 J10.G14 J10.G17 J10.G20 J10.G23 J10.G26 J10.G29 J10.G32 J10.G35 J10.G38 J10.G40 J10.H3 J10.H6 J10.H9(H<9>) J10.H12 J10.H15 J10.H18 J10.H21 J10.H24 J10.H27 J10.H30 J10.H33 J10.H36 J10.H39 J11.1 J12.1 J12.9 J12.10 J12.11 J12.14 J12.17 J12.20(VEET3) J13.1 J14.1 J15.1 J16.1 J16.9 J16.10 J16.11 J16.14 J16.17 J16.20(VEET3) J17.1 J18.1 J19.1 J20.1 J20.9 J20.10 J20.11 J20.14 J20.17 J20.20(VEET3) J21.1 J22.1 J23.1 J24.1 J24.9 J24.10 J24.11 J24.14 J24.17 J24.20(VEET3) J25.1 J26.1 J27.1 J28.1 J28.9 J28.10 J28.11 J28.14 J28.17 J28.20(VEET3) J29.1 J30.1 J31.1 J32.1 J32.9 J32.10 J32.11 J32.14 J32.17 J32.20(VEET3) J33.1 J34.1 J35.1 J36.1 J36.9 J36.10 J36.11 J36.14 J36.17 J36.20(VEET3) J37.1 J38.1 SFP1.1 SFP1.2 SFP1.3 SFP1.4 SFP1.5 SFP1.6 SFP1.7 SFP1.8 SFP1.9 SFP1.10 SFP1.11 SFP1.12 SFP1.13 SFP1.14 SFP1.15 SFP1.16 SFP1.17 SFP1.18 SFP1.19 SFP1.20 SFP1.21 SFP1.22 SFP1.23 SFP1.24 SFP1.25 SFP1.26 SFP1.27 SFP1.28 SFP1.29 SFP1.30 SFP1.31 SFP1.32 SFP1.33 SFP1.34 SFP1.35 SFP1.36 SFP1.37 SFP1.38 SFP1.39 SFP1.40 SFP1.41 SFP1.42 SFP1.43 SFP1.44 SFP1.45 SFP1.46 SFP2.1 SFP2.2 SFP2.3 SFP2.4 SFP2.5 SFP2.6 SFP2.7 SFP2.8 SFP2.9 SFP2.10 SFP2.11 SFP2.12 SFP2.13 SFP2.14 SFP2.15 SFP2.16 SFP2.17 SFP2.18 SFP2.19 SFP2.20 SFP2.21 SFP2.22 SFP2.23 SFP2.24 SFP2.25 SFP2.26 SFP2.27 SFP2.28 SFP2.29 SFP2.30 SFP2.31 SFP2.32 SFP2.33 SFP2.34 SFP2.35 SFP2.36 SFP2.37 SFP2.38 SFP2.39 SFP2.40 SFP2.41 SFP2.42 SFP2.43 SFP2.44 SFP2.45 SFP2.46 U2.2 U2.7 U3.5 U4.5 U5.5 U6.5 U7.5 U8.5 U9.5 U10.5
P1V3: R22.2(B<0>) R23.2(B<0>) R34.2(B<0>) R35.2(B<0>) R42.2(B<0>) R43.2(B<0>) R50.2(B<0>) R51.2(B<0>) R99.2(B<0>) R100.2(B<0>) R107.2(B<0>) R108.2(B<0>) R115.2(B<0>) R116.2(B<0>) R123.2(B<0>) R124.2(B<0>)
P1V8A: U2.4 U2.5(SNS)
P2V5: IC21.3
P3V3: C31.2(B<0>) C32.2(B<0>) C40.2(B<0>) C41.2(B<0>) C45.2(B<0>) C46.2(B<0>) C50.2(B<0>) C51.2(B<0>) C59.2(B<0>) C60.2(B<0>) C64.2(B<0>) C65.2(B<0>) C69.2(B<0>) C70.2(B<0>) C74.2(B<0>) C75.2(B<0>) IC10.21 IC21.2 J10.C39 J10.D36 J10.D38 J10.D40 L4.1 L5.2(B<0>) L6.1 L7.2(B<0>) L8.1 L9.2(B<0>) L10.1 L11.2(B<0>) L12.1 L13.2(B<0>) L14.1 L15.2(B<0>) L16.1 L17.2(B<0>) L18.1 L19.2(B<0>) R24.1 R25.1 R26.2(B<0>) R27.2(B<0>) R28.2(B<0>) R29.2(B<0>) R36.1 R37.1 R38.2(B<0>) R39.2(B<0>) R40.2(B<0>) R41.2(B<0>) R44.1 R45.1 R46.2(B<0>) R47.2(B<0>) R48.2(B<0>) R49.2(B<0>) R52.1 R53.1 R54.2(B<0>) R55.2(B<0>) R56.2(B<0>) R57.2(B<0>) R101.1 R102.1 R103.2(B<0>) R104.2(B<0>) R105.2(B<0>) R106.2(B<0>) R109.1 R110.1 R111.2(B<0>) R112.2(B<0>) R113.2(B<0>) R114.2(B<0>) R117.1 R118.1 R119.2(B<0>) R120.2(B<0>) R121.2(B<0>) R122.2(B<0>) R125.1 R126.1 R127.2(B<0>) R128.2(B<0>) R129.2(B<0>) R130.2(B<0>) U3.8 U4.8 U5.8 U6.8 U7.8 U8.8 U9.8 U10.8
P3V3A: U2.1 U2.6
P12V: J10.C35 J10.C37
VCC: IC2.9 IC2.19 IC2.22 IC2.32 U1.8
VDD: IC1.5 IC1.20
VEE: U1.5
3P3VAUX: J10.D32
CDR_D_N: J10.C7
CDR_D_P: J10.C6
CLK_IN_N<1>: J10.G7
CLK_IN_P<1>: J10.G6
CLK_MAIN_N<0>: U3.4
CLK_MAIN_N<1>: U4.4
CLK_MAIN_N<2>: U5.4
CLK_MAIN_N<3>: U6.4
CLK_MAIN_N<4>: U10.4
CLK_MAIN_N<5>: U9.4
CLK_MAIN_N<6>: U8.4
CLK_MAIN_N<7>: U7.4
CLK_MAIN_N<8>: J10.G3
CLK_MAIN_P<0>: U3.3
CLK_MAIN_P<1>: U4.3
CLK_MAIN_P<2>: U5.3
CLK_MAIN_P<3>: U6.3
CLK_MAIN_P<4>: U10.3
CLK_MAIN_P<5>: U9.3
CLK_MAIN_P<6>: U8.3
CLK_MAIN_P<7>: U7.3
CLK_MAIN_P<8>: J10.G2
DP0_C2M_N: J10.C3
DP0_C2M_P: J10.C2
FMC_LA_N<1>: J10.D9
FMC_LA_N<2>: J10.H8 U3.2
FMC_LA_N<3>: J10.G10
FMC_LA_N<4>: J10.H11 U4.2
FMC_LA_N<5>: J10.D12
FMC_LA_N<6>: J10.C11
FMC_LA_N<7>: J10.H14 U5.2
FMC_LA_N<8>: J10.G13
FMC_LA_N<9>: J10.D15
FMC_LA_N<10>: J10.C15
FMC_LA_N<11>: J10.H17 U6.2
FMC_LA_N<12>: J10.G16
FMC_LA_N<13>: J10.D18
FMC_LA_N<14>: J10.C19
FMC_LA_N<15>: J10.H20 U10.2
FMC_LA_N<16>: J10.G19
FMC_LA_N<17>: J10.D21
FMC_LA_N<18>: J10.C23
FMC_LA_N<19>: J10.H23 U9.2
FMC_LA_N<20>: J10.G22
FMC_LA_N<21>: J10.H26 U8.2
FMC_LA_N<22>: J10.G25
FMC_LA_N<23>: J10.D24
FMC_LA_N<24>: J10.H29 U7.2
FMC_LA_N<25>: J10.G28
FMC_LA_N<27>: IC21.8 J10.C27
FMC_LA_N<28>: J10.H32
FMC_LA_N<29>: J10.G31
FMC_LA_N<30>: J10.H35
FMC_LA_N<31>: J10.G34
FMC_LA_N<32>: J10.H38
FMC_LA_N<33>: J10.G37
FMC_LA_P<1>: J10.D8
FMC_LA_P<2>: J10.H7 U3.1
FMC_LA_P<3>: J10.G9
FMC_LA_P<4>: J10.H10 U4.1
FMC_LA_P<5>: J10.D11
FMC_LA_P<6>: J10.C10
FMC_LA_P<7>: J10.H13 U5.1
FMC_LA_P<8>: J10.G12
FMC_LA_P<9>: J10.D14
FMC_LA_P<10>: J10.C14
FMC_LA_P<11>: J10.H16 U6.1
FMC_LA_P<12>: J10.G15
FMC_LA_P<13>: J10.D17
FMC_LA_P<14>: J10.C18
FMC_LA_P<15>: J10.H19 U10.1
FMC_LA_P<16>: J10.G18
FMC_LA_P<17>: J10.D20
FMC_LA_P<18>: J10.C22
FMC_LA_P<19>: J10.H22 U9.1
FMC_LA_P<20>: J10.G21
FMC_LA_P<21>: J10.H25 U8.1
FMC_LA_P<22>: J10.G24
FMC_LA_P<23>: J10.D23
FMC_LA_P<24>: J10.H28 U7.1
FMC_LA_P<25>: J10.G27
FMC_LA_P<26>: IC21.7 J10.D26
FMC_LA_P<27>: IC21.6 J10.C26
FMC_LA_P<28>: J10.H31
FMC_LA_P<29>: J10.G30
FMC_LA_P<30>: J10.H34
FMC_LA_P<31>: J10.G33
FMC_LA_P<32>: J10.H37
FMC_LA_P<33>: J10.G36
GBTCLK0_M2C_N: J10.D5
GBTCLK0_M2C_P: J10.D4
I2C_SCL: IC10.19 J1.2
I2C_SCL_CVCC: J10.C30
I2C_SDA: IC10.20(SDA) J1.3(A<2>)
I2C_SDA_CVCC: J10.C31
MOD_ABS: J7.6 R26.1
MOD_ABS_1: J12.6 R38.1
MOD_ABS_2: J16.6 R46.1
MOD_ABS_3: J20.6 R54.1
MOD_ABS_4: J24.6 R103.1
MOD_ABS_5: J28.6 R111.1
MOD_ABS_6: J32.6 R119.1
MOD_ABS_7: J36.6 R127.1
MUX_SEL<0>: IC21.15(1B<0>)
MUX_SEL<1>: IC21.14
MUX_SEL<2>: IC21.13
POWER_GOOD: J10.D1
PRSNT_L: J10.H2
RD_BUF_N<0>: J7.12 J8.3(A<2>)
RD_BUF_N<1>: J12.12 J13.3(A<2>)
RD_BUF_N<2>: J16.12 J17.3(A<2>)
RD_BUF_N<3>: J20.12 J21.3(A<2>)
RD_BUF_P<0>: J7.13 J8.2
RD_BUF_P<1>: J12.13 J13.2
RD_BUF_P<2>: J16.13 J17.2
RD_BUF_P<3>: J20.13 J21.2
RD_MUX_N<4>: J36.12 J37.3(A<2>)
RD_MUX_N<5>: J32.12 J33.3(A<2>)
RD_MUX_N<6>: J28.12 J29.3(A<2>)
RD_MUX_N<7>: J24.12 J25.3(A<2>)
RD_MUX_P<4>: J36.13 J37.2
RD_MUX_P<5>: J32.13 J33.2
RD_MUX_P<6>: J28.13 J29.2
RD_MUX_P<7>: J24.13 J25.2
REC_CLK_FPGA_N: J10.H5
REC_CLK_FPGA_P: J10.H4
RST_I2C_B: IC10.24 IC21.12
RST_I2C_B_CVCC: IC21.9 J10.D27
SFP_FAULT<0>: IC10.10 J7.2 R24.2(B<0>)
SFP_FAULT<1>: IC10.11 J12.2 R36.2(B<0>)
SFP_FAULT<2>: IC10.12 J16.2 R44.2(B<0>)
SFP_FAULT<3>: IC10.13 J20.2 R52.2(B<0>)
SFP_FAULT<4>: IC10.14
SFP_FAULT<5>: IC10.15
SFP_FAULT<6>: IC10.16
SFP_FAULT<7>: IC10.17
SFP_I2C_SCL<0>: J7.5 J9.2 R27.1
SFP_I2C_SCL<1>: J12.5 J14.2 R39.1
SFP_I2C_SCL<2>: J16.5 J18.2 R47.1
SFP_I2C_SCL<3>: J20.5 J22.2 R55.1
SFP_I2C_SCL<4>: J36.5 J38.2 R128.1
SFP_I2C_SCL<5>: J32.5 J34.2 R120.1
SFP_I2C_SCL<6>: J28.5 J30.2 R112.1
SFP_I2C_SCL<7>: J24.5 J26.2 R104.1
SFP_I2C_SDA<0>: J7.4 J9.3(A<2>) R28.1
SFP_I2C_SDA<1>: J12.4 J14.3(A<2>) R40.1
SFP_I2C_SDA<2>: J16.4 J18.3(A<2>) R48.1
SFP_I2C_SDA<3>: J20.4 J22.3(A<2>) R56.1
SFP_I2C_SDA<4>: J36.4 J38.3(A<2>) R129.1
SFP_I2C_SDA<5>: J32.4 J34.3(A<2>) R121.1
SFP_I2C_SDA<6>: J28.4 J30.3(A<2>) R113.1
SFP_I2C_SDA<7>: J24.4 J26.3(A<2>) R105.1
SFP_LOS<0>: J7.8 R25.2(B<0>)
SFP_LOS<1>: J12.8 R37.2(B<0>)
SFP_LOS<2>: J16.8 R45.2(B<0>)
SFP_LOS<3>: J20.8 R53.2(B<0>)
SFP_LOS<4>: J36.8 R126.2(B<0>)
SFP_LOS<5>: J32.8 R118.2(B<0>)
SFP_LOS<6>: J28.8 R110.2(B<0>)
SFP_LOS<7>: J24.8 R102.2(B<0>)
SFP_TD_N: J6.3(A<2>) J7.19 R23.1 U3.6
SFP_TD_N_1: J11.3(A<2>) J12.19 R35.1 U4.6
SFP_TD_N_2: J15.3(A<2>) J16.19 R43.1 U5.6
SFP_TD_N_3: J19.3(A<2>) J20.19 R51.1 U6.6
SFP_TD_N_4: J23.3(A<2>) J24.19 R100.1 U7.6
SFP_TD_N_5: J27.3(A<2>) J28.19 R108.1 U8.6
SFP_TD_N_6: J31.3(A<2>) J32.19 R116.1 U9.6
SFP_TD_N_7: J35.3(A<2>) J36.19 R124.1 U10.6
SFP_TD_P: J6.2 J7.18 R22.1 U3.7(Q_P)
SFP_TD_P_1: J11.2 J12.18 R34.1 U4.7(Q_P)
SFP_TD_P_2: J15.2 J16.18 R42.1 U5.7(Q_P)
SFP_TD_P_3: J19.2 J20.18 R50.1 U6.7(Q_P)
SFP_TD_P_4: J23.2 J24.18 R99.1 U7.7(Q_P)
SFP_TD_P_5: J27.2 J28.18 R107.1 U8.7(Q_P)
SFP_TD_P_6: J31.2 J32.18 R115.1 U9.7(Q_P)
SFP_TD_P_7: J35.2 J36.18 R123.1 U10.7(Q_P)
SFP_TX_DISABLE<0>: IC10.1 J7.3 TP2.1(A<0>)
SFP_TX_DISABLE<1>: IC10.2 J12.3 TP3.1(A<0>)
SFP_TX_DISABLE<2>: IC10.3 J16.3 TP4.1(A<0>)
SFP_TX_DISABLE<3>: IC10.4 J20.3 TP5.1(A<0>)
SFP_TX_DISABLE<4>: IC10.5 J36.3 TP9.1(A<0>)
SFP_TX_DISABLE<5>: IC10.6 J32.3 TP8.1(A<0>)
SFP_TX_DISABLE<6>: IC10.7 J28.3 TP7.1(A<0>)
SFP_TX_DISABLE<7>: IC10.8 J24.3 TP6.1(A<0>)
SFP_TX_FAULT<4>: J36.2 R125.2(B<0>)
SFP_TX_FAULT<5>: J32.2 R117.2(B<0>)
SFP_TX_FAULT<6>: J28.2 R109.2(B<0>)
SFP_TX_FAULT<7>: J24.2 R101.2(B<0>)
TCK: J10.D29
TDI: J10.D30
TDO: J10.D31
TMS: J10.D33
TRST_L: J10.D34
UNNAMED_1_CAPCERSMDCL2_I31_B: C34.2(B<0>) C35.2(B<0>) J7.15 L5.1
UNNAMED_1_CAPCERSMDCL2_I31_B_1: C43.2(B<0>) C44.2(B<0>) J12.15 L7.1
UNNAMED_1_CAPCERSMDCL2_I31_B_2: C48.2(B<0>) C49.2(B<0>) J16.15 L9.1
UNNAMED_1_CAPCERSMDCL2_I31_B_3: C53.2(B<0>) C54.2(B<0>) J20.15 L11.1
UNNAMED_1_CAPCERSMDCL2_I31_B_4: C62.2(B<0>) C63.2(B<0>) J24.15 L13.1
UNNAMED_1_CAPCERSMDCL2_I31_B_5: C67.2(B<0>) C68.2(B<0>) J28.15 L15.1
UNNAMED_1_CAPCERSMDCL2_I31_B_6: C72.2(B<0>) C73.2(B<0>) J32.15 L17.1
UNNAMED_1_CAPCERSMDCL2_I31_B_7: C77.2(B<0>) C78.2(B<0>) J36.15 L19.1
UNNAMED_1_CAPCERSMDCL2_I35_B: C33.2(B<0>) J7.16 L4.2(B<0>)
UNNAMED_1_CAPCERSMDCL2_I35_B_1: C42.2(B<0>) J12.16 L6.2(B<0>)
UNNAMED_1_CAPCERSMDCL2_I35_B_2: C47.2(B<0>) J16.16 L8.2(B<0>)
UNNAMED_1_CAPCERSMDCL2_I35_B_3: C52.2(B<0>) J20.16 L10.2(B<0>)
UNNAMED_1_CAPCERSMDCL2_I35_B_4: C61.2(B<0>) J24.16 L12.2(B<0>)
UNNAMED_1_CAPCERSMDCL2_I35_B_5: C66.2(B<0>) J28.16 L14.2(B<0>)
UNNAMED_1_CAPCERSMDCL2_I35_B_6: C71.2(B<0>) J32.16 L16.2(B<0>)
UNNAMED_1_CAPCERSMDCL2_I35_B_7: C76.2(B<0>) J36.16 L18.2(B<0>)
UNNAMED_1_CON20PSFP_I19_RATES_1: J12.7 R41.1
UNNAMED_1_CON20PSFP_I19_RATES_2: J16.7 R49.1
UNNAMED_1_CON20PSFP_I19_RATES_3: J20.7 R57.1
UNNAMED_1_CON20PSFP_I19_RATES_4: J24.7 R106.1
UNNAMED_1_CON20PSFP_I19_RATES_5: J28.7 R114.1
UNNAMED_1_CON20PSFP_I19_RATES_6: J32.7 R122.1
UNNAMED_1_CON20PSFP_I19_RATES_7: J36.7 R130.1
UNNAMED_1_CON20PSFP_I19_RATESEL: J7.7 R29.1
UNNAMED_4_FMCLPCGENERIC_I1_GA0: J10.C34
UNNAMED_4_FMCLPCGENERIC_I1_GA1: J10.D35
UNNAMED_8_LP38692SD_I104_EN: U2.3
UNNAMED_13_74AVC4T245BRIS_I75_1: IC21.4
UNNAMED_13_74AVC4T245BRIS_I75_2: IC21.1
UNNAMED_13_74AVC4T245BRIS_I76_1: IC21.16
UNNAMED_13_74AVC4T245BRIS_I76_2: IC21.5
UNNAMED_13_RSMD0402_I6_B: IC10.18
UNNAMED_13_RSMD0402_I8_B: IC10.23
VADJ: J10.G39 J10.H40
VREF_A_M2C: J10.H1

Pads without a net: IC1 1 2 3 4 6 7 8 9 10 11 12 13 14 15 16 18 19 21 22 23 24; IC2 1 2 3 4 5 6 7 8 10 11 12 13 14 15 16 17 18 23 24 25 26 27 28 29 30 31; IC10 22; J2 1 2 3; J3 1 2 3; J4 1 2 3; R1 1 2; SFP1 NC; SFP2 NC; U1 1 2 3 4 6 7

## Text on the board
BOTTOM: B
User.Comments: PIN A1 REF. | SECOND CONNECTOR | (OPTIONAL) | PRIMARY CONNECTOR
TOP: T
L2: 2
L3: 3
L4: 4
L5: 5
DIMENSION: INPUT 1
